# Altium PCB FOC_Drive.PcbDoc
Units mil, origin at the board's own origin, x right, y up, seen from the top; angles counter-clockwise.
Board outline 3150 x 2360 mil, 2 copper layers (Top Layer, Bottom Layer); 50 components, 67 nets, 333 pads, 81 vias.
Unrouted connection lines stored in the file: 1.
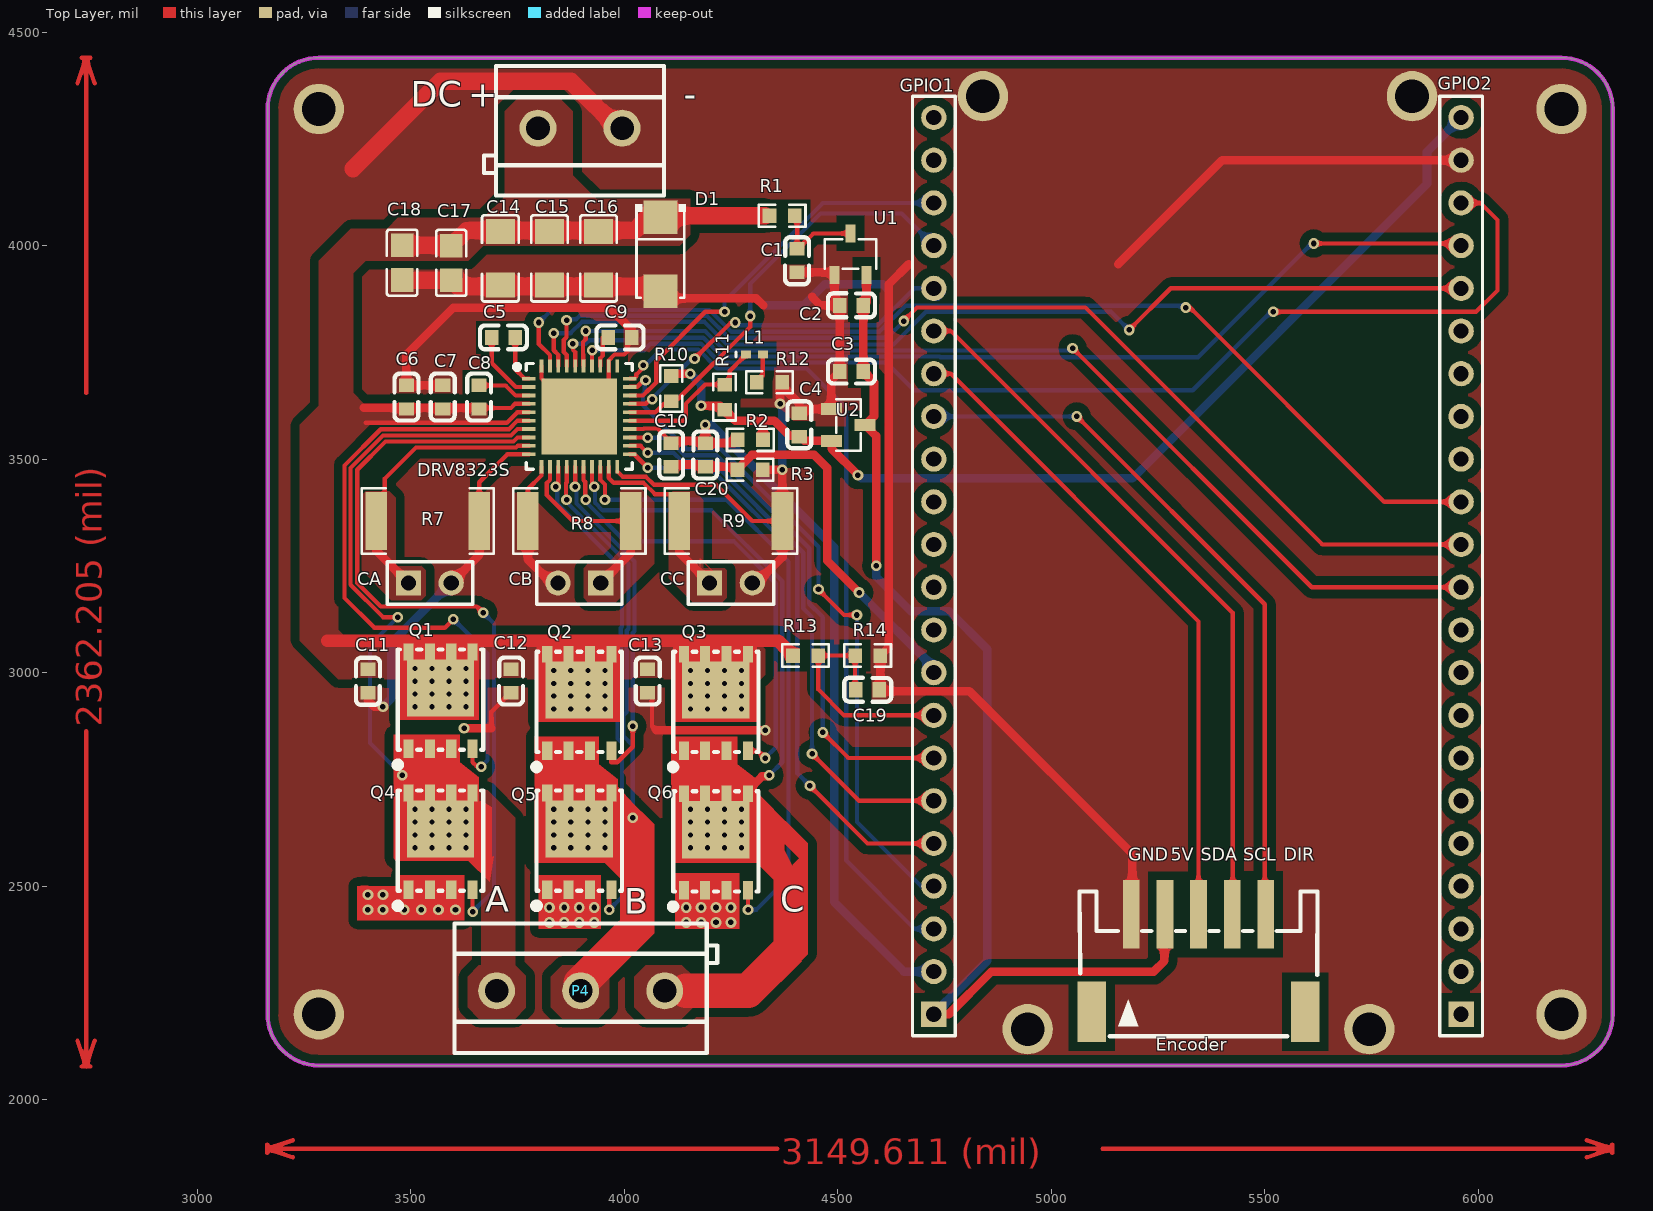
[diagram p0: Top Layer view]
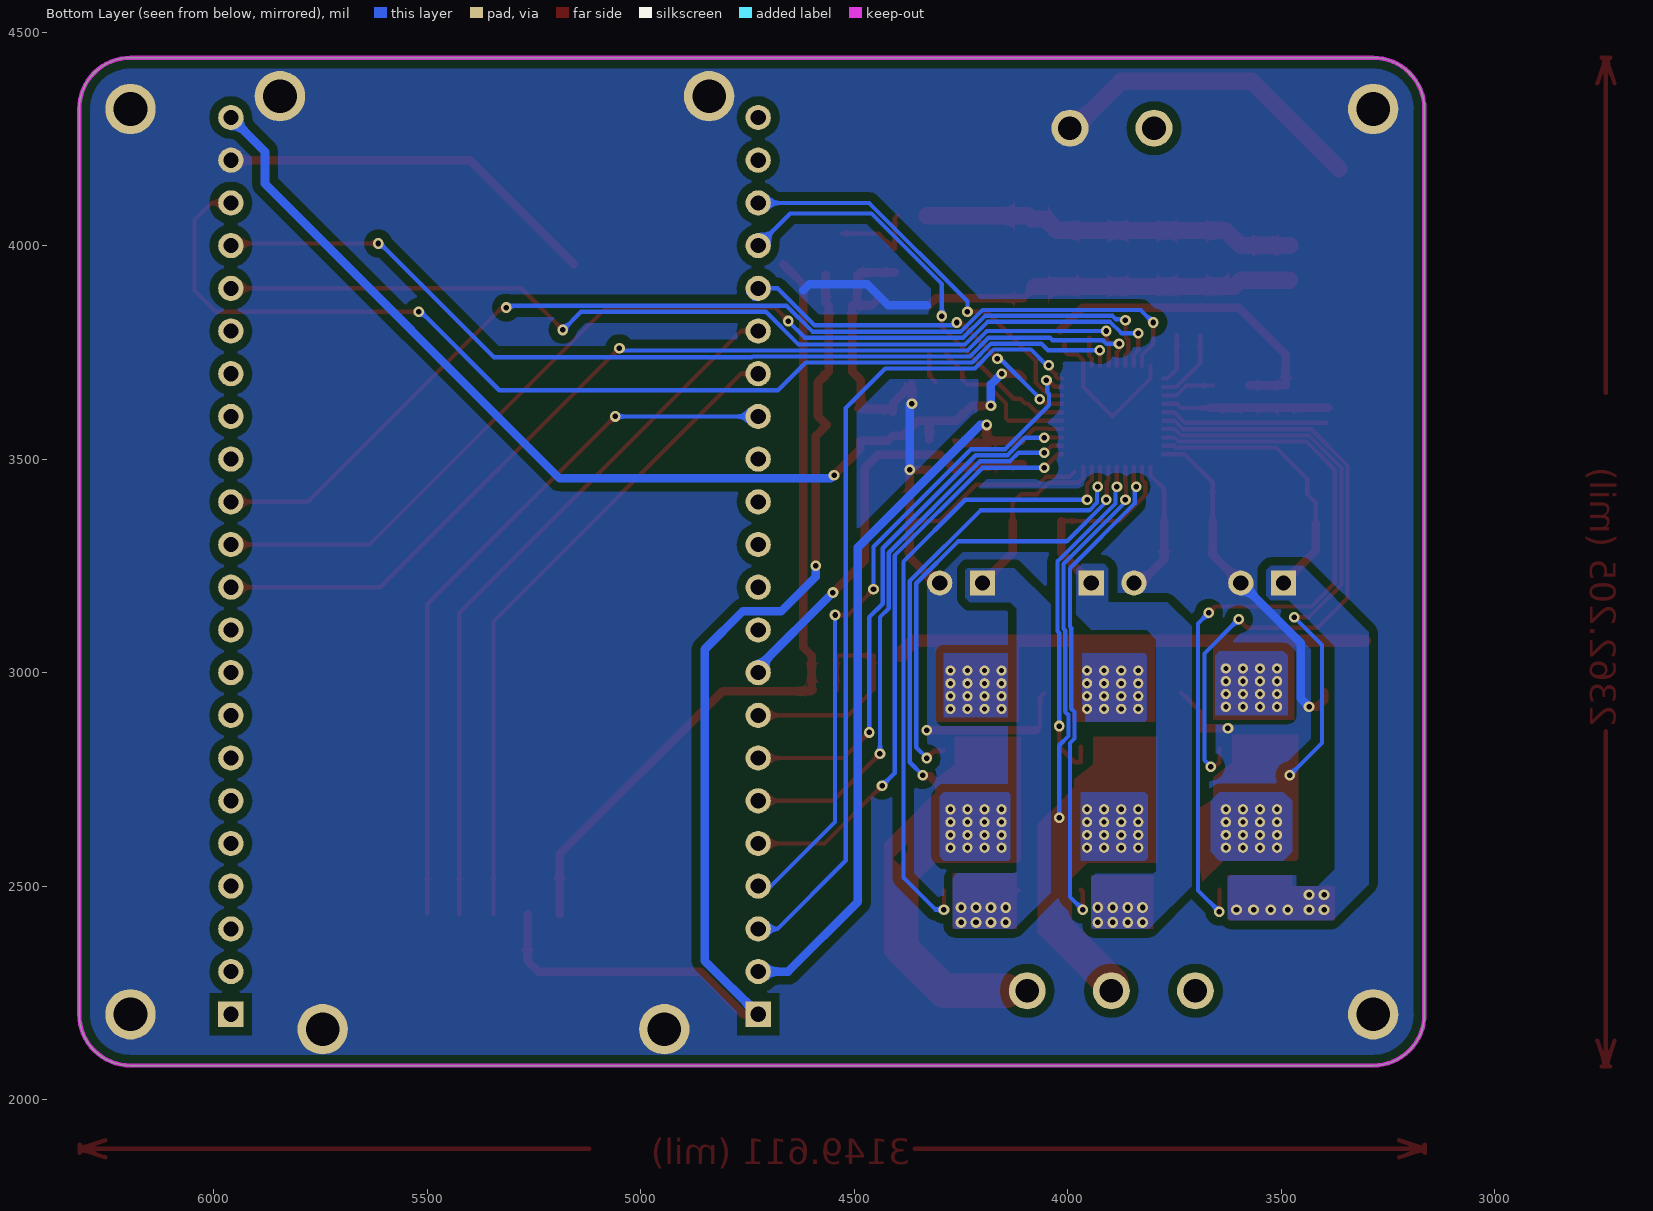
[diagram p1: Bottom Layer view, seen from below]

## Layer stack, top to bottom
Top Solder: solder mask 0.4, Solder Resist, Dk 3.5
Top Layer: signal copper 1.4
Dielectric 1: dielectric 12.6, FR-4, Dk 4.8
Bottom Layer: signal copper 1.4
Bottom Solder: solder mask 0.4, Solder Resist, Dk 3.5

## Board outline
3165,2200 ccw(c3285,2200) 3285,2080 6195,2080 ccw(c6195,2200) 6315,2200 6315,4320 ccw(c6195,4320) 6195,4440 3285,4440 ccw(c3285,4320) 3165,4320

## Design rules (kind name [scope] priority, off if disabled: settings)
Clearance [All] p1: gap=20 ignorepadtopadclearanceinfootprint=FALSE
PolygonConnect [All] p1: connectstyle=Direct reliefconductorwidth=10 reliefentries=4 polygonreliefangle="90 Angle" airgapwidth=10
RoutingVias [All] p1: holewidth=13 width=25 viastyle="Through Hole" minholewidth=13 minwidth=25 maxholewidth=28 maxwidth=50
SolderMaskExpansion [All] p1: expansion=4
Width [All] p1: maxlimit=40 minlimit=10 preferedwidth=10 minimp=50.000000 maximp=50.000000 favimp=50.000000
30 further rules are at their usual default settings.

## Classes and differential pairs
component class FOC_Drive_2: C20 R2 R3

## Components (designator, comment, footprint, x,y, rotation, side; value= is the part's Value field where it differs from the comment)
C1 "Cap" C0603 4405,3965 r90 top value=10uF
C2 "Cap" C0603 4532.44,3860 r0 top value=10uF
C3 "Cap" C0603 4532.44,3705 r0 top value=1uF
C4 "Cap" C0603 4410,3580 r270 top value=1uF
C5 "Cap" C0603 3717.45,3785 r0 top value=47nF
C6 "Cap" C0603 3490,3645 r270 top value=20uF
C7 "Cap" C0603 3575,3645 r270 top value=0.1uF
C8 "Cap" C0603 3660,3645 r270 top value=1uF
C9 "Cap" C0603 3990,3785 r180 top value=1uF
C10 "Cap" C0603 4110,3510 r90 top value=0.1uF
C11 "Cap" C0603 3400,2980 r90 top value=2.2uF
C12 "Cap" C0603 3735,2980 r270 top value=2.2uF
C13 "Cap" C0603 4055,2980 r270 top value=2.2uF
C14 "Cap" C1206 3710,3970 r90 top value=100uF
C15 "Cap" C1206 3825,3970 r90 top value=100uF
C16 "Cap" C1206 3940,3970 r90 top value=100uF
C17 "Cap" C0805 3595,3959.45 r90 top value=0.1uF
C18 "Cap" C0805 3480,3960 r90 top value=0.1uF
C19 "Cap" C0603 4570,2960 r180 top value=2.2uF
C20 "Cap" C0603 4190,3510 r90 top value=1uF
CA "Current_A" HDR1X2 3495,3210 r0 top (schematic designator P6)
CB "Current_B" HDR1X2 3945,3210 r180 top (schematic designator P7)
CC "Current_C" HDR1X2 4200,3210 r0 top (schematic designator P8)
D1 "SMAJ26A_C840755" SMAJ26A-SMA_L4.3-W2.6-LS5.1-RD 4085,3980 r270 top
DC "DC" CONN-TH_P5.00_KF301-5.0-2P 3896.57,4275 r180 top (schematic designator P5)
DRV8323S "DRV8323SRTAR 40PIN" "DRV8323SRTAR WQFN-40_L6.0-W6.0-P0.50-TL-EP4.5" 3895,3600 r0 top (schematic designator U3)
Encoder "Encoder" CONN-SMD_5P-P2.00_HX20007-5AWB 5345,2320 r0 top (schematic designator P3)
GPIO1 "GPIO1" HDR1X22 4725,2200 r90 top (schematic designator P1)
GPIO2 "GPIO2" HDR1X22 5960,2200 r90 top (schematic designator P2)
L1 "RED" 0402-A 4305,3745 r0 top (schematic designator LED1)
P4 "Motor" CONN-TH_3P-P5.00_KF301-5.0-3P 3898.15,2255 r0 top
Q1 "WSD75100DN56-DFN5X6-8" WSD75100DN56_DFN-8_L5.8-W4.9-P1.27-LS6.1-BL 3570,2935 r0 top
Q2 "WSD75100DN56-DFN5X6-8" WSD75100DN56_DFN-8_L5.8-W4.9-P1.27-LS6.1-BL 3894.84,2930 r0 top
Q3 "WSD75100DN56-DFN5X6-8" WSD75100DN56_DFN-8_L5.8-W4.9-P1.27-LS6.1-BL 4214.69,2930 r0 top
Q4 "WSD75100DN56-DFN5X6-8" WSD75100DN56_DFN-8_L5.8-W4.9-P1.27-LS6.1-BL 3570,2605 r0 top
Q5 "WSD75100DN56-DFN5X6-8" WSD75100DN56_DFN-8_L5.8-W4.9-P1.27-LS6.1-BL 3894.84,2605 r0 top
Q6 "WSD75100DN56-DFN5X6-8" WSD75100DN56_DFN-8_L5.8-W4.9-P1.27-LS6.1-BL 4214.69,2603.19 r0 top
R1 "0R" R0603 4370,4070 r0 top
R2 "0R" R0603 4295.35,3545 r180 top
R3 "0R" R0603 4295,3475 r180 top
R7 "0.005Ohm" R2512 3540,3355 r180 top
R8 "0.005Ohm" R2512 3895,3355 r0 top
R9 "0.005Ohm" R2512 4250,3355 r180 top
R10 "10K" R0603 4110,3665 r90 top
R11 "10K" R0603 4235,3645 r90 top
R12 "1K" R0603 4340,3680 r180 top
R13 "10K" R0603 4425,3040 r180 top
R14 "2K" R0603 4570.35,3040 r180 top
U1 "PW8600A_5V" SOT23-3_L2.9-W1.6-P1.90-LS2.8-BR 4530,3980 r270 top
U2 "PW6566B_3.3" SOT-23-3L_L2.9-W1.3-P1.90-LS2.4-BR 4525,3580 r180 top

## Footprints (in the part's own frame and the unit in brackets; to place one, negate y for a bottom-side part, rotate by r counter-clockwise, add the part's x,y. Pads: shape width x height; smd on the part's side, far side on the other; paste and mask are expansions set on the pad)
0402-A [mm] "Chip Inductor, Body 1.0x0.5mm, IPC High Density"
  rect 0.6x0.5 smd: 1(-0.5,0) 2(0.5,0)
  silkscreen extent -1.1,-0.15 -1.1,0.15, body extent -0.55,-0.3 0.55,0.3, height 0.55
C0603 [mm]
  rect 0.8x0.9 smd: 1(-0.7,0) 2(0.7,0)
  silkscreen extent -1.41,-0.71 1.39,0.72
C0805 [mm]
  rect 1.41x1.35 smd: 1(-1.03,0) 2(1.03,0)
  silkscreen extent -1.96,-0.9 1.96,0.9
C1206 [mm]
  rect 1.485x1.728 smd: 1(-1.593,0) 2(1.593,0)
  silkscreen extent -2.56,-1.09 2.56,1.09
CONN-SMD_5P-P2.00_HX20007-5AWB [mm]
  rect 1x4.1 smd: 1(-4,2.9) 2(-2,2.9) 3(0,2.9) 4(2,2.9) 5(4,2.9)
  rect 1.7x3.6 smd: 6(6.35,-2.9) 7(-6.35,-2.9)
  silkscreen extent -7.08,-4.35 7.07,4.25
CONN-TH_3P-P5.00_KF301-5.0-3P [mm]
  round 2.2 hole 1.4: 1(-5,0) 2(0,0) 3(5,0)
  silkscreen extent -7.5,-3.7 8.13,4
CONN-TH_P5.00_KF301-5.0-2P [mm]
  round 2.2 hole 1.4: 1(-2.5,0) 2(2.5,0)
  silkscreen extent -5,-3.7 5.71,4
"DRV8323SRTAR WQFN-40_L6.0-W6.0-P0.50-TL-EP4.5" [mm]
  rect 0.8x0.22 smd: 1(-3,2.25) 2(-3,1.75) 3(-3,1.25) 4(-3,0.75) 5(-3,0.25) 6(-3,-0.25) 7(-3,-0.75) 8(-3,-1.25) 9(-3,-1.75) 10(-3,-2.25) 21(3,-2.25) 22(3,-1.75) 23(3,-1.25) 24(3,-0.75) 25(3,-0.25) 26(3,0.25) 27(3,0.75) 28(3,1.25) 29(3,1.75) 30(3,2.25)
  rect 0.22x0.8 smd: 11(-2.25,-3) 12(-1.75,-3) 13(-1.25,-3) 14(-0.75,-3) 15(-0.25,-3) 16(0.25,-3) 17(0.75,-3) 18(1.25,-3) 19(1.75,-3) 20(2.25,-3) 31(2.25,3) 32(1.75,3) 33(1.25,3) 34(0.75,3) 35(0.25,3) 36(-0.25,3) 37(-0.75,3) 38(-1.25,3) 39(-1.75,3) 40(-2.25,3)
  rect 4.5x4.5 smd: 41(0,0)
  silkscreen extent -3.85,-3.15 3.15,3.15
HDR1X2 [mm] "Connector; Header; 2 Position"
  rect 1.5x1.5 hole 0.9: 1(0,0)
  round 1.5 hole 0.9: 2(2.54,0)
  silkscreen extent -1.27,-1.27 3.81,1.27
HDR1X22 [mm] "Connector; Header; 22 Position"
  rect 1.5x1.5 hole 0.9: 1(0,0)
  round 1.5 hole 0.9: 2(2.54,0) 3(5.08,0) 4(7.62,0) 5(10.16,0) 6(12.7,0) 7(15.24,0) 8(17.78,0) 9(20.32,0) 10(22.86,0) 11(25.4,0) 12(27.94,0) 13(30.48,0) 14(33.02,0) 15(35.56,0) 16(38.1,0) 17(40.64,0) 18(43.18,0) 19(45.72,0) 20(48.26,0) 21(50.8,0) 22(53.34,0)
  silkscreen extent -1.27,-1.27 54.61,1.27
R0603 [mil]
  rect 31.75x34.02 smd: 1(-29.65,0) 2(29.65,0)
  silkscreen extent -55,-26 55,26
R2512 [mil]
  rect 50.49x136.06 smd: 1(-120.72,0) 2(120.72,0)
  silkscreen extent -155,-77 155,77
SMAJ26A-SMA_L4.3-W2.6-LS5.1-RD [mm]
  rect 2x2 smd: 1(-2.2,0) 2(2.2,0)
  silkscreen extent -2.98,-1.5 2.6,1.5
SOT23-3_L2.9-W1.6-P1.90-LS2.8-BR [mm]
  rect 1.07x0.6 smd: 1(1.235,-0.95) 2(1.235,0.95) 3(-1.235,0)
  silkscreen extent -0.88,-1.54 0.88,1.54
SOT-23-3L_L2.9-W1.3-P1.90-LS2.4-BR [mm]
  rect 1.25x0.7 smd: 1(1,-0.95) 2(1,0.95) 3(-1,0)
  silkscreen extent -0.73,-1.53 0.73,1.53
WSD75100DN56_DFN-8_L5.8-W4.9-P1.27-LS6.1-BL [mm]
  rect 0.6x1.1 smd: 1(-1.905,-2.875) 2(-0.635,-2.875) 3(0.635,-2.875) 4(1.905,-2.875)
  rect 0.6x1 smd: 5(1.905,2.875) 6(0.635,2.875) 7(-0.635,2.875) 8(-1.905,2.875)
  rect 4x3.4 smd: 9(0,0.738)
  silkscreen extent -2.67,-3.96 2.54,3.03

## Part data
C1 C2 C3 C4 C5 C6 C7 C8 C9 C10 C11 C12 C13 C14 C15 C16 C17 C18 C19 C20: "Capacitor 50V", LatestRevisionDate=17-Jul-2002, LatestRevisionNote="Re-released for DXP Platform.", PackageDescription="Radial Cap, Thru-Hole; 2 Leads; 0.3 in Pin Spacing", PackageReference=RAD-0.3, Published=8-Jun-2000, Publisher="Altium Limited"
CA CB CC DC: library part "Header 2", "Header, 2-Pin", LatestRevisionDate=17-Jul-2002, LatestRevisionNote="Re-released for DXP Platform.", Publisher="Altium Limited"
D1: BOM_JLCPCB Part Class="Extended Part", BOM_Manufacturer="MDD（Microdiode Electronics?", BOM_Manufacturer Part=SMAJ26A, BOM_Supplier=LCSC, BOM_Supplier Part=C840755, Contributor=LCSC, spicePre=D, spiceSymbolName=SMAJ26A_C840755
Encoder: library part "Header 5", "Header, 5-Pin", LatestRevisionDate=17-Jul-2002, LatestRevisionNote="Re-released for DXP Platform.", Publisher="Altium Limited"
GPIO1 GPIO2: library part "Header 22", "Header, 22-Pin", LatestRevisionDate=17-Jul-2002, LatestRevisionNote="Re-released for DXP Platform.", Publisher="Altium Limited"
L1: library part LED2, "Typical RED, GREEN, YELLOW, AMBER GaAs LED", LatestRevisionDate=17-Jul-2002, LatestRevisionNote="Re-released for DXP Platform.", PackageDescription="SM LED; 2 Flat Leads", PackageReference=3.2X1.6X1.1, PackageVersion=Feb-2002, Published=8-Jun-2000, Publisher="Altium Limited"
P4: library part "Header 3", "Header, 3-Pin", LatestRevisionDate=17-Jul-2002, LatestRevisionNote="Re-released for DXP Platform.", Publisher="Altium Limited"
R1 R2 R3 R7 R8 R9 R10 R11 R12 R13 R14: library part Res2, "Resistor", LatestRevisionDate=17-Jul-2002, LatestRevisionNote="Re-released for DXP Platform.", PackageDescription="Axial Device, Thru-Hole; 2 Leads; 0.4 in Pin Spacing", PackageReference=AXIAL-0.4, Published=8-Jun-2000, Publisher="Altium Limited"
U1 U2: library part "AMS1117_3.3 SOT-89"

## Free pads (board coordinates)
  round 24 hole 12: 10(3510,2590) 10(3510,2620) 10(3510,2650) 10(3510,2680) 10(3510,2920) 10(3510,2950) 10(3510,2980) 10(3510,3010) 10(3550,2590) 10(3550,2620) 10(3550,2650) 10(3550,2680) 10(3550,2920) 10(3550,2950) 10(3550,2980) 10(3550,3010) 10(3590,2590) 10(3590,2620) 10(3590,2650) 10(3590,2680) 10(3590,2920) 10(3590,2950) 10(3590,2980) 10(3590,3010) 10(3630,2590) 10(3630,2620) 10(3630,2650) 10(3630,2680) 10(3630,2920) 10(3630,2950) 10(3630,2980) 10(3630,3010) 10(3835,2590) 10(3835,2620) 10(3835,2650) 10(3835,2680) 10(3835,2915) 10(3835,2945) 10(3835,2975) 10(3835,3005) 10(3875,2590) 10(3875,2620) 10(3875,2650) 10(3875,2680) 10(3875,2915) 10(3875,2945) 10(3875,2975) 10(3875,3005) 10(3915,2590) 10(3915,2620) 10(3915,2650) 10(3915,2680) 10(3915,2915) 10(3915,2945) 10(3915,2975) 10(3915,3005) 10(3955,2590) 10(3955,2620) 10(3955,2650) 10(3955,2680) 10(3955,2915) 10(3955,2945) 10(3955,2975) 10(3955,3005) 10(4155,2590) 10(4155,2620) 10(4155,2650) 10(4155,2680) 10(4155,2915) 10(4155,2945) 10(4155,2975) 10(4155,3005) 10(4195,2590) 10(4195,2620) 10(4195,2650) 10(4195,2680) 10(4195,2915) 10(4195,2945) 10(4195,2975) 10(4195,3005) 10(4235,2590) 10(4235,2620) 10(4235,2650) 10(4235,2680) 10(4235,2915) 10(4235,2945) 10(4235,2975) 10(4235,3005) 10(4275,2590) 10(4275,2620) 10(4275,2650) 10(4275,2680) 10(4275,2915) 10(4275,2945) 10(4275,2975) 10(4275,3005)
  round 118.11 hole 78.74: 11(6195,2200) 12(6195,4320) 13(3285,4320) 14(3285,2200) 15(4840,4350) 15(5845,4350) 16(4945,2165) 16(5745,2165)

## Via types
v1: diameter 25, hole 13, Top Layer to Bottom Layer, 81 vias

## Nets (pads, with @x,y where several pads share a name; then routed paths per layer and width w, separated by ;. In a path a pad name is that pad's centre, name@x,y a point inside that pad or via, vN(x,y) a via of type N, cw(c..) or ccw(c..) an arc to the next point about the centre after c; other vN are vias at no path point)
3.3V: C4.2 GPIO2.22 R2.1 R10.2 R11.1 U2.2 | length 2442
  Top Layer w10: 4320,3590 4325,3585
  Top Layer w20: R10.2@4105,3689.66 R10.2 4115.35,3700 v1(4155,3700) ; v1(4180,3625) 4224.65,3625 4234.65,3615 R11.1 4260.35,3590 4320,3590 4351.86,3590 4386.97,3554.89 4410,3554.89 4422.29,3542.6 U2.2 4485.63,3524.37 v1(4547.37,3462.63) ; R2.1 4325,3585
  Bottom Layer w10: v1(4547.37,3462.63) v1@4555,3455
  Bottom Layer w20: v1(4155,3700) 4180,3675 v1(4180,3625) ; v1@4555,3455 5190,3455 5880,4145 5880,4220 GPIO2.22
+5: C2.2 C3.2 Encoder.2 GPIO1.1 U1.2 U2.3 | length 2677.1
  Top Layer w10: C2.2 C2.2@4567.4,3867.4
  Top Layer w20: C2.2 C3.2 4585,3680 4585,3600.63 U2.3 4590,3554.37 v1(4590,3250) ; C2.2@4567.4,3867.4 U1.2 ; GPIO1.1 4760,2200 4860,2300 5240,2300 5265,2325 Encoder.2@5265,2434.17
  Bottom Layer w20: v1(4590,3250) 4590,3225 4671.47,3143.53 4761.47,3143.53 4850,3055 4850,2325 GPIO1.1
+24V: C6.2 C7.2 C8.2 C11.2 C12.1 C13.1 C14.2 C15.2 C16.2 C17.2 C18.2 D1.1 DC.2 DRV8323S.4 DRV8323S.5 pad.10@3510,2920 pad.10@3510,2950 pad.10@3510,2980 pad.10@3510,3010 pad.10@3550,2920 pad.10@3550,2950 pad.10@3550,2980 pad.10@3550,3010 pad.10@3590,2920 pad.10@3590,2950 pad.10@3590,2980 pad.10@3590,3010 pad.10@3630,2920 pad.10@3630,2950 pad.10@3630,2980 pad.10@3630,3010 pad.10@3835,2915 pad.10@3835,2945 pad.10@3835,2975 pad.10@3835,3005 pad.10@3875,2915 pad.10@3875,2945 pad.10@3875,2975 pad.10@3875,3005 pad.10@3915,2915 pad.10@3915,2945 pad.10@3915,2975 pad.10@3915,3005 pad.10@3955,2915 pad.10@3955,2945 pad.10@3955,2975 pad.10@3955,3005 pad.10@4155,2915 pad.10@4155,2945 pad.10@4155,2975 pad.10@4155,3005 pad.10@4195,2915 pad.10@4195,2945 pad.10@4195,2975 pad.10@4195,3005 pad.10@4235,2915 pad.10@4235,2945 pad.10@4235,2975 pad.10@4235,3005 pad.10@4275,2915 pad.10@4275,2945 pad.10@4275,2975 pad.10@4275,3005 Q1.5 Q1.6 Q1.7 Q1.8 Q1.9 Q2.5 Q2.6 Q2.7 Q2.8 Q2.9 Q3.5 Q3.6 Q3.7 Q3.8 Q3.9 R1.1 R13.2 | length 2771.8
  Top Layer w10: 3395,3585 3725,3585 3749.84,3609.84 DRV8323S.5 ; C17.2@3594.45,4000.55 C17.2 ; C8.2@3667.55,3620 3735,3620 3744.53,3629.53 DRV8323S.4 ; DC.2@3794.72,4261.57 DC.2@3798.15,4265
  Top Layer w20: 3390,3620 C8.2@3667.55,3620 ; D1.1@4085,4061.87 D1.1@4093.13,4070
  Top Layer w30: 3305,3074.66 3819.84,3074.66 3869.84,3074.66 4360.69,3074.66 R13.2
  Top Layer w40: C18.2 C17.2@3594.45,4000.55 ; C17.2 3630.7,4035.7 4025.7,4035.7 4051.87,4061.87 D1.1@4085,4061.87 ; D1.1@4093.13,4070 R1.1@4330,4070
A3.3V: C10.2 C20.2 DRV8323S.24 GPIO1.2 R2.2 | length 1869.8
  Top Layer w10: DRV8323S.24 4045.06,3570.47 4046.09,3571.5 4078.5,3571.5 C10.2@4107.44,3542.55 ; C20.2@4180,3542.55 C20.2@4185,3537.55 ; R2.2@4258.24,3537.55 R2.2
  Top Layer w20: C10.2@4107.44,3542.55 C20.2@4180,3542.55 ; C20.2@4185,3537.55 C20.2 ; v1(4190,3580) C20.2 ; R2.2@4258.24,3537.55 C20.2
  Bottom Layer w20: v1(4190,3580) 4205,3580 4491.5,3293.5 4491.5,2463.5 4655,2300 4711,2300 GPIO1.2@4725,2314
AGND: C10.1 C20.1 GPIO1.9 R3.2 | length 986.3
  Top Layer w10: C20.1@4180,3487.45 C20.1@4185,3482.45 ; R3.2@4257.9,3482.45 R3.2 R3.2@4265.35,3476.13
  Top Layer w20: C10.1@4105,3487.45 C20.1@4180,3487.45 ; C20.1@4185,3482.45 C20.1 R3.2@4257.9,3482.45 ; R3.2@4265.35,3476.13 4299.21,3510 4445,3510 4475,3480 4475,3262.5 v1(4550,3187.5)
  Bottom Layer w20: v1(4550,3187.5) 4725,3012.5 GPIO1.9
CS: GPIO1.11
DC: GPIO1.12
DIR: Encoder.5 GPIO1.15 | length 1680.6
  Top Layer w10: v1(5060,3600) 5500,3160 Encoder.5@5500,2436.65
  Bottom Layer w10: GPIO1.15 v1(5060,3600)
DRV_nSCS: DRV8323S.29 GPIO1.4 | length 1595.2
  Top Layer w10: DRV8323S.29 4013.78,3669.57 4030.51,3669.57 4045.94,3685 v1(4050,3685) ; v1(4455,3195) 4515,3135 v1(4545,3135)
  Bottom Layer w10: v1(4050,3685) 4048.47,3683.47 4048.47,3657.5 4043.97,3653 4043.97,3626.03 4146.73,3523.27 4226.73,3523.27 4455,3295 v1(4455,3195) ; v1(4545,3135) 4545,2650 4695,2500 GPIO1.4
ENABLE: DRV8323S.30 GPIO1.3 | length 1928.5
  Top Layer w10: DRV8323S.30 4023.19,3688.58 4028.5,3693.89 4028.5,3698.5 4045,3715 v1(4045,3720)
  Bottom Layer w10: v1(4045,3720) 4050,3720 4086.5,3756.5 4173.7,3756.5 4217.81,3712.39 4427.61,3712.39 4520,3620 4520,2560 4680,2400 GPIO1.3
GH_A: DRV8323S.6 Q1.4 | length 1518
  Top Layer w10: v1(3600,3125) 3580,3105 3415,3105 3345,3175 3345,3485 3430,3570 3730,3570 3750.16,3590.16 DRV8323S.6 ; Q1.4 3645,2790 3655,2780 v1(3665,2780)
  Bottom Layer w10: v1(3600,3125) 3680,3045 3680,2795 v1(3665,2780)
GH_B: DRV8323S.15 Q2.4 | length 816.4
  Top Layer w10: v1(3885,3435) 3885.16,3435.16 DRV8323S.15 ; Q2.4@3969.84,2826.66 Q2.4 3969.84,2790.16 3983.72,2790.16 4020,2826.44 v1(4020,2875)
  Bottom Layer w10: v1(3885,3435) 3888.5,3431.5 3888.5,3396.09 4024,3260.59 4024,3097.09 4020,3093.09 v1(4020,2875)
GH_C: DRV8323S.16 Q3.4 | length 1075.2
  Top Layer w10: DRV8323S.16 3904.84,3450.57 3908.5,3446.91 3908.5,3406.5 v1(3910,3405) ; Q3.4 4313.19,2816.81 v1(4330,2800)
  Bottom Layer w10: v1(3910,3405) 3912.87,3402.13 3912.87,3396.93 4002.34,3307.46 4257.03,3307.46 4355,3209.49 4355,2825 v1(4330,2800)
GL_A: DRV8323S.8 Q4.4 | length 1805.6
  Top Layer w10: v1(3645,2440) Q4.4 ; v1(3670,3140) 3655,3155 3429.8,3155 3374.8,3210 3374.8,3475 3441.03,3541.23 3740.83,3541.23 3750.39,3550.79 DRV8323S.8
  Bottom Layer w10: v1(3645,2440) 3695,2490 3695,3115 v1(3670,3140)
GL_B: DRV8323S.13 Q5.4 | length 1173.4
  Top Layer w10: v1(3840,3435) 3845.79,3440.79 DRV8323S.13 ; v1(3965,2445) 3965,2486.97 Q5.4
  Bottom Layer w10: v1(3840,3435) 3843.5,3431.5 3843.5,3395.99 3995,3244.49 3995,3107.69 3992,3104.69 3992,2915.48 3984.5,2907.98 3984.5,2845.7 3995,2835.2 3995,2475 v1(3965,2445)
GL_C: DRV8323S.18 Q6.4 | length 1482.6
  Top Layer w10: DRV8323S.18 3944.21,3451.2 3955,3440.41 v1(3955,3405) ; Q6.4 4289.84,2489.84 4289.84,2445.16 v1(4290,2445)
  Bottom Layer w10: v1(3955,3405) 4240,3405 4385,3260 4385,2520 4310,2445 v1(4290,2445)
GND: C1.1 C2.1 C3.1 C4.1 C6.1 C7.1 C9.1 C11.1 C12.2 C13.2 C14.1 C15.1 C16.1 C17.1 C18.1 C19.1 CA.2 CB.2 CC.2 D1.2 DC.1 DRV8323S.10 DRV8323S.11 DRV8323S.20 DRV8323S.32 DRV8323S.40 DRV8323S.41 Encoder.1 GPIO2.21 pad.11 pad.12 pad.13 pad.14 pad.15 pad.16 R3.1 R7.1 R8.1 R9.1 R12.1 R14.1 U1.1 U2.1 | length 9236.2
  Top Layer w10: C18.1 C18.1@3480.55,3918.9 ; R7.1 3660.72,3445.72 3726.42,3511.42 DRV8323S.10 ; 3688.94,2870 3688.94,2908.35 3733.03,2952.45 C12.2 ; R8.1 3774.28,3429.28 3806.42,3461.42 DRV8323S.11 ; DRV8323S.40 3806.42,3688.58 DRV8323S.41 3963.9,3668.9 DRV8323S.32 3963.9,3731.24 3977.6,3744.93 4000.21,3744.93 4007.55,3752.28 C9.1@4007.55,3777.28 ; CB.2@3820.61,3219.39 CB.2@3835.61,3219.39 ; DRV8323S.20@3984.25,3471.14 3996.89,3458.5 4051.09,3458.5 4069.59,3440 4215,3440 4300,3355 R9.1 ; C13.2 4065,2942.45 4065,2875 4075,2865 ; D1.2@4076.96,3904.3 D1.2@4104.76,3876.5 ; CC.2 4309.39,3219.39 CC.2@4319.39,3219.39 ; 4325.94,3860 4330,3860 ; R12.1@4365,3675.34 R12.1 ; U2.1@4485,3628.51 4496.11,3617.4 U2.1 ; U1.1@4486.54,3937.45 U1.1 ; C2.1@4492.6,3874.26 4504.89,3861.97 C2.1
  Top Layer w20: C11.1@3400,2953.67 C11.1 3400,2935 3415,2920 v1(3435,2920) ; C7.1 C6.1 3490,3745 3600,3855 3965,3855 C9.1@4017.55,3802.45 ; CA.2 3660.72,3275.72 R7.1 ; v1(3625,2870) 3688.94,2870 ; R8.1 3774.28,3265.72 CB.2@3820.61,3219.39 ; CB.2@3835.61,3219.39 CB.2 ; 4075,2865 v1(4330,2865) ; D1.2@4104.76,3876.5 4309.44,3876.5 4325.94,3860 ; CC.2@4319.39,3219.39 4370.72,3270.72 R9.1 ; R3.1 v1(4370,3475) 4370.36,3474.64 R9.1@4370.36,3356.08 ; v1(4365,3630) R12.1@4365,3675.34 ; R12.1@4370,3670 4410,3630 4410,3610 4417.4,3617.4 U2.1 ; C1.1 U1.1@4486.54,3937.45 ; 4440,3880 4460,3860 C2.1 C3.1 4485,3685.11 U2.1@4485,3628.51 ; C2.1@4492.6,3874.26 U1.1 ; C19.1 C19.1@4600,2957.55 ; 4666.47,3956.47 4620,3910 4620,3060 R14.1 C19.1@4600,2957.55 ; 5156.47,3956.47 5400,4200 GPIO2.21 ; Encoder.1@5190,2434.17 5190,2575 4808.53,2956.47 4601.08,2956.47 C19.1@4600,2957.55
  Top Layer w40: 3365,4180 3570,4385 3875,4385 DC.1@3995,4265 ; C18.1@3480.55,3918.9 C17.1 3609.59,3904.3 D1.2@4076.96,3904.3
  Bottom Layer w20: v1(3435,2920) 3455,2940 3455,3070 CA.2 ; 4330,3860 4420,3860 4470,3910 4605,3910 4620,3895 ; v1(4365,3630) 4370,3625 v1(4370,3475)
GPIO_3: GPIO1.14
GPIO_4: GPIO1.13
GPIO_11: GPIO1.10
GPIO_22: GPIO2.1
GPIO_23: GPIO2.2
GPIO_24: GPIO2.3
GPIO_25: GPIO2.4
GPIO_26: GPIO2.5
GPIO_27: GPIO2.6
GPIO_28: GPIO2.7
GPIO_29: GPIO2.8
GPIO_30: GPIO2.9
GPIO_33: GPIO2.10
GPIO_37: GPIO2.14
GPIO_38: GPIO2.15
GPIO_39: GPIO2.16
GPIO_40: GPIO2.17
GPIO_52: GPIO1.22
GPIO_54: GPIO1.21
I2C1_SCL: Encoder.4 GPIO1.17 | length 1679.2
  Top Layer w10: GPIO1.17 4765,3800 5425,3140 Encoder.4@5425,2434.17
I2C1_SDA: Encoder.3 GPIO1.16 | length 1546.1
  Top Layer w10: GPIO1.16 4765,3700 5345,3120 Encoder.3
Motor_A: DRV8323S.7 P4.1 pad.10@3510,2590 pad.10@3510,2620 pad.10@3510,2650 pad.10@3510,2680 pad.10@3550,2590 pad.10@3550,2620 pad.10@3550,2650 pad.10@3550,2680 pad.10@3590,2590 pad.10@3590,2620 pad.10@3590,2650 pad.10@3590,2680 pad.10@3630,2590 pad.10@3630,2620 pad.10@3630,2650 pad.10@3630,2680 Q1.1 Q1.2 Q1.3 Q4.5 Q4.6 Q4.7 Q4.8 Q4.9 | length 1845.4
  Top Layer w10: v1(3470,3130) 3435,3130 3359,3206 3359,3479 3435.23,3555.23 3735.03,3555.23 3750.27,3570.47 DRV8323S.7 ; Q4.8 Q1.1 ; Q4.7 3545,2770 Q1.2 ; Q4.9 3574.36,2634.06 Q4.9@3575.3,2635 ; Q4.6 3595,2770 Q1.3 ; Q4.5@3645,2709.99 3645,2740
  Top Layer w20: 3495,2795 Q1.1 ; 3520,2770 3545,2770 3595,2770 3615,2770 3645,2740
  Top Layer w40: 3495,2795 3520,2770
  Bottom Layer w10: v1(3470,3130) 3405,3065 3405,2835 v1(3480,2760)
Motor_B: DRV8323S.14 P4.2 pad.10@3835,2590 pad.10@3835,2620 pad.10@3835,2650 pad.10@3835,2680 pad.10@3875,2590 pad.10@3875,2620 pad.10@3875,2650 pad.10@3875,2680 pad.10@3915,2590 pad.10@3915,2620 pad.10@3915,2650 pad.10@3915,2680 pad.10@3955,2590 pad.10@3955,2620 pad.10@3955,2650 pad.10@3955,2680 Q2.1 Q2.2 Q2.3 Q5.5 Q5.6 Q5.7 Q5.8 Q5.9 | length 1679.7
  Top Layer w10: Q2.1 3810,2806.97 3814.92,2802.05 3913.25,2703.73 3931.97,2685 3955,2685 4002.29,2685 4010,2677.29 ; v1(3865,3404.9) 3865,3410.33 3863.5,3411.83 3863.5,3443.91 3865.47,3445.88 DRV8323S.14 ; Q5.5 3969.84,2716.8 3976.65,2709.99 Q5.5@3977.3,2709.99
  Top Layer w40: Q5.5@3977.3,2709.99 4002.29,2685 ; 4010,2385 4010,2677.29
  Top Layer w80: P4.2 3898.15,2273.15 4010,2385
  Bottom Layer w10: v1(3865,3404.9) 3865,3399.8 4010,3254.8 4010,3102.89 4006,3098.89 4006,2908.18 4000,2902.18 ; 3998.5,2902.18 3998.5,2851.5 4020,2830 v1(4020,2660)
Motor_C: DRV8323S.17 P4.3 pad.10@4155,2590 pad.10@4155,2620 pad.10@4155,2650 pad.10@4155,2680 pad.10@4195,2590 pad.10@4195,2620 pad.10@4195,2650 pad.10@4195,2680 pad.10@4235,2590 pad.10@4235,2620 pad.10@4235,2650 pad.10@4235,2680 pad.10@4275,2590 pad.10@4275,2620 pad.10@4275,2650 pad.10@4275,2680 Q3.1 Q3.2 Q3.3 Q6.5 Q6.6 Q6.7 Q6.8 Q6.9 | length 1644.4
  Top Layer w10: DRV8323S.17 3924.53,3444.53 3930,3439.06 v1(3930,3435) ; Q6.5@4289.69,2714.99 Q6.5 Q6.5@4289.69,2724.25 ; v1@4337.13,2757.13 v1(4340,2760)
  Top Layer w20: Q3.1 4139.69,2785.32 4155,2770 4265,2770 4289.69,2745.32 4289.69,2724.25 4322.56,2757.13 v1@4337.13,2757.13
  Top Layer w80: 4145,2255 4290,2255 4387.5,2352.5
  Bottom Layer w10: v1(3930,3435) 3931.5,3433.5 3931.5,3398.09 3949.59,3380 4204.29,3380 4370,3214.29 4370,2790 v1(4340,2760)
NetC1_2: C1.2 R1.2 U1.3 | length 219.6
  Top Layer w10: R1.2 4405,4064.66 C1.2 4406.97,3992.55 4443.04,4028.63 U1.3
NetC5_1: C5.1 DRV8323S.2 | length 175.1
  Top Layer w10: C5.1@3690,3790 3690,3770.11 3690,3725 3746.1,3668.9 DRV8323S.2
NetC5_2: C5.2 DRV8323S.1 | length 120.5
  Top Layer w10: C5.2@3745,3790 C5.2 3745,3710.39 3766.81,3688.58 DRV8323S.1
NetC8_1: C8.1 DRV8323S.3 | length 126.6
  Top Layer w10: C8.1 3722.45,3672.55 3745.79,3649.21 DRV8323S.3
NetC9_2: C9.2 DRV8323S.33 | length 69.3
  Top Layer w10: DRV8323S.33 3944.21,3736.86 3950,3742.65 C9.2@3950,3785
NetLED1_1: DRV8323S.25 L1.1 R11.2 | length 369.8
  Top Layer w10: DRV8323S.25 4139.14,3590.16 4145,3596.02 4145,3630 4189.65,3674.66 R11.2 4236.13,3674.66 4247.01,3685.53 4247.01,3706.69 4278.5,3738.19 4278.5,3740.16 4283.35,3745 L1.1
NetLED1_2: L1.2 R12.2 | length 70.9
  Top Layer w10: R12.2 4310.35,3681.13 4324.69,3695.47 L1.2
SN_A: 
SN_B: 
SN_C: 
SO_A: DRV8323S.23 GPIO1.7 | length 1257.2
  Top Layer w10: DRV8323S.23 4054.21,3550.79 v1(4055,3550) ; v1(4465,2860) 4525,2800 GPIO1.7
  Bottom Layer w10: v1(4055,3550) 4100.2,3550 4140.93,3509.27 4215.73,3509.27 4433.5,3291.5 4433.5,3161.5 4465,3130 v1(4465,2860)
SO_B: DRV8323S.22 GPIO1.6 | length 1320
  Top Layer w10: DRV8323S.22 4038.49,3531.1 4054.59,3515 v1(4055,3515) ; v1(4440,2810) 4550,2700 GPIO1.6
  Bottom Layer w10: v1(4055,3515) 4115.4,3515 4135.13,3495.27 4205.13,3495.27 4419.5,3280.9 4419.5,3150.5 4440,3130 v1(4440,2810)
SO_C: DRV8323S.21 GPIO1.5 | length 1388.2
  Top Layer w10: DRV8323S.21 4023.58,3511.42 v1(4055,3480) ; v1(4435,2735) 4570,2600 GPIO1.5
  Bottom Layer w10: v1(4055,3480) 4200,3480 4405.5,3274.5 4405.5,2764.5 v1(4435,2735)
SP_A: CA.1 DRV8323S.9 Q4.1 Q4.2 Q4.3 R7.2 | length 703.6
  Top Layer w10: R7.2@3419.28,3350 R7.2 3419.28,3397.78 3439.53,3418.03 3439.53,3454.53 3512.23,3527.23 3746.63,3527.23 3750.5,3531.1 DRV8323S.9
  Top Layer w20: 3385,2491.81 3398.19,2491.81 v1@3403.19,2486.81 ; R7.2@3419.28,3350 3419.28,3285.72 CA.1 ; Q4.1 3525,2491.81
  other v1: 3400,2445 3435,2445 3485,2445 3525,2445 3565,2445 3605,2445 3400,2480 3435,2480
SP_B: CB.1 DRV8323S.12 Q5.1 Q5.2 Q5.3 R8.2 | length 669.2
  Top Layer w10: 3819.84,2470.16 Q5.1 Q5.2 Q5.3 v1@3919.84,2410 ; DRV8323S.12 3826.1,3451.51 3818.5,3443.91 3818.5,3416.09 3879.59,3355 R8.2
  Top Layer w20: CB.1 4015.72,3280.72 R8.2
  other v1: 3825,2415 3860,2415 3895,2415 3930,2415 3825,2450 3860,2450 3895,2450 3930,2450
SP_C: CC.1 DRV8323S.19 Q6.1 Q6.2 Q6.3 R9.2 | length 474.2
  Top Layer w10: DRV8323S.19 3963.9,3456.1 3975.5,3444.5 4045.3,3444.5 4071.76,3418.03 4109.03,3418.03 4129.28,3397.78 R9.2 ; 4115,2490 Q6.1 ; 4130,2455 4135,2450 v1(4145,2450)
  Top Layer w20: R9.2 4129.28,3280.72 CC.1
  other v1: 4145,2415 4180,2415 4215,2415 4250,2415 4180,2450 4215,2450 4250,2450
SPI1_MISO: DRV8323S.26 GPIO1.19 R10.1 | length 994.4
  Top Layer w10: DRV8323S.26 4073.36,3609.84 4093.87,3630.34 4100,3630.34 4110.88,3641.22 4126.63,3641.22 4295,3809.59 v1(4295,3835)
  Bottom Layer w10: v1(4295,3835) 4295,3910 4460,4075 4650,4075 GPIO1.19
SPI1_MOSI: DRV8323S.27 GPIO1.18 | length 884.4
  Top Layer w10: DRV8323S.27 4050.47,3629.53 4060.94,3640 v1(4065.47,3640) ; v1(4164.8,3735) 4249.8,3820 v1(4260,3820)
  Bottom Layer w10: v1(4065.47,3640) 4065.47,3642.34 4158.13,3735 v1(4164.8,3735) ; v1(4260,3820) 4266.5,3813.5 4593.3,3813.5 4679.8,3900 GPIO1.18 4725,3875.47 4735.16,3875.47 GPIO1.18@4748.65,3888.96
SPI1_SCK: DRV8323S.28 GPIO1.20 | length 942.7
  Top Layer w10: DRV8323S.28 4044.28,3649.21 4058.57,3663.5 4058.91,3663.5 4075,3679.59 4075,3730 4190,3845 v1(4235,3845)
  Bottom Layer w10: v1(4235,3845) 4235,3869.8 4465.2,4100 GPIO1.20
TIM1_CH1: DRV8323S.34 GPIO2.20 | length 2572
  Top Layer w10: DRV8323S.34 3924.76,3718.34 3924.76,3754.76 v1(3925,3755) ; v1(5520,3845) 5995,3845 6045,3895 6045,4060 6005,4100 GPIO2.20
  Bottom Layer w10: v1(3925,3755) 4046.53,3755 4062.03,3770.5 4179.5,3770.5 4223.61,3726.39 4613.61,3726.39 4678.53,3661.47 5331.47,3661.47 5515,3845 v1(5520,3845)
TIM1_CH1N: DRV8323S.35 GPIO2.11 | length 2388.2
  Top Layer w10: DRV8323S.35 3904.17,3718.78 3904.17,3745.42 3903.5,3746.09 3903.5,3774.44 3910,3780.94 v1(3910,3800) ; v1(5050,3760) 5610,3200 GPIO2.11
  Bottom Layer w10: v1(3910,3800) 4189.6,3800 4235.1,3754.5 5044.5,3754.5 v1(5050,3760)
TIM1_CH2: DRV8323S.36 GPIO2.19 | length 2269.5
  Top Layer w10: v1(3880,3770) 3880,3755.94 3885.16,3750.78 DRV8323S.36 ; v1(5615,4005) GPIO2.19@5960,4005
  Bottom Layer w10: v1(3880,3770) 3909.59,3770 3918.09,3778.5 4035.93,3778.5 4041.93,3784.5 4185.3,3784.5 4229.41,3740.39 4739.09,3740.39 4740.99,3738.5 5343.5,3738.5 5610,4005 v1(5615,4005)
TIM1_CH2N: DRV8323S.37 GPIO2.12 | length 2492.7
  Top Layer w10: v1(3865,3825) 3865,3785.41 3858.5,3778.91 3858.5,3751.09 3865.47,3744.12 DRV8323S.37 ; v1(4655,3823.3) 4655,3824.49 4685.51,3855 5080,3855 5635,3300 GPIO2.12
  Bottom Layer w10: v1(3865,3825) 3867.87,3827.87 3887.67,3827.87 3895.3,3835.5 4193.7,3835.5 4244.7,3784.5 4616.2,3784.5 v1(4655,3823.3)
TIM1_CH3: DRV8323S.38 GPIO2.18 | length 2329
  Top Layer w10: v1(3835,3795) 3835,3754.8 3845.79,3744.01 DRV8323S.38 ; v1(5182.5,3802.5) 5280,3900 GPIO2.18
  Bottom Layer w10: v1(3835,3795) 3874.59,3795 3901.09,3821.5 4187.9,3821.5 4240.9,3768.5 4630.6,3768.5 4707.1,3845 5140,3845 v1(5182.5,3802.5)
TIM1_CH3N: DRV8323S.39 GPIO2.13 | length 2521.2
  Top Layer w10: v1(3800,3820) 3800,3769.59 3826.1,3743.49 DRV8323S.39 ; v1(5315,3855) 5325,3855 5780,3400 GPIO2.13
  Bottom Layer w10: v1(3800,3820) 3829.5,3849.5 4199.5,3849.5 4250.5,3798.5 4598.09,3798.5 4658.59,3859 5311,3859 v1(5315,3855)
VBUS_S: C19.2 GPIO1.8 R13.1 R14.2 | length 547.8
  Top Layer w10: C19.2@4544.89,2955 4540.69,2959.2 R14.2 R13.1 4454.65,2960.34 4515,2900 GPIO1.8
pads on no net: DRV8323S.31 Encoder.6 Encoder.7
copper on no net: | length 4544.3
  Top Layer w10: 2720,2137.8 2740,2077.8 ; 2720,4380 2740,4440 ; 2730,2077.8 2750,2077.8 ; 2730,4440 2750,4440 ; 2740,2863.02 2740,2077.8 ; 2740,3654.77 2740,4440 ; 2760,2137.8 2740,2077.8 ; 2760,4380 2740,4440 ; 3164.25,1875 3164.25,1895 ; 3224.25,1865 3164.25,1885 ; 3224.25,1905 3164.25,1885 ; 4358.18,1885 3164.25,1885 ; 5119.94,1885 6313.87,1885 ; 6253.87,1865 6313.87,1885 ; 6253.87,1905 6313.87,1885 ; 6313.87,1875 6313.87,1895

## Polygon pours and split planes (outlines as drawn)
Motor_A on Top Layer "MOTOR_A_L01_P071" (solid, remove dead copper, pour order 71): 3660,2725 3680,2725 3745,2660 3745,2305 3740,2300 3670,2300 3665,2305 3665,2680 3645,2700 3645,2710
GND on Top Layer "GND_L01_P008" (solid, remove dead copper, pour order 8): 3265,4440 ccw(c3265,4340) 3165,4340 3165,2180 ccw(c3265,2180) 3265,2080 6215,2080 ccw(c6215,2180) 6315,2180 6315,4340 ccw(c6215,4340) 6215,4440
+24V on Top Layer "+24V_L01_P075" (solid, remove dead copper, pour order 75): 3330,3506.05 3410,3586.05 3410,3600 3310,3600 3307.5,3602.5 3305,3600 3305,3520 3316.05,3520
Motor_A on Top Layer "MOTOR_A_L01_P028" (solid, remove dead copper, pour order 28): 3660,2315 3745,2315 3770,2290 3770,2215 3745,2190 3660,2190 3633.39,2216.61 3633.39,2288.39
Motor_B on Top Layer "MOTOR_B_L01_P030" (solid, remove dead copper, pour order 30): 3855,2315 3940,2315 3965,2290 3965,2215 3940,2190 3855,2190 3828.39,2216.61 3828.39,2288.39
Motor_C on Top Layer "MOTOR_C_L01_P032" (solid, remove dead copper, pour order 32): 4050,2315 4135,2315 4160,2290 4160,2215 4135,2190 4050,2190 4023.39,2216.61 4023.39,2288.39
SP_C on Top Layer "SP_C_L01_P069" (solid, remove dead copper, pour order 69): 4178.39,3266.61 4206.27,3238.73 4178.39,3238.73
SP_C on Top Layer "SP_C_L01_P067" (solid, remove dead copper, pour order 67): 4240,3175 4230,3165 4160,3165 4104.21,3220.79 4104.21,3415.47 4113.74,3425 4165,3425 4185,3405 4185,3245 4235,3245 4240,3240
SP_B on Top Layer "SP_B_L01_P061" (solid, remove dead copper, pour order 61): 3915,3255 3905,3245 3905,3175 3915,3165 3980,3165 4070,3255 4070,3400 4040,3430 3995,3430 3990,3425 3990,3285 3960,3255
no net on Top Layer "NONET_L01_P055" (solid, remove dead copper, pour order 55): 3385,3270
SP_A on Top Layer "SP_A_L01_P053" (solid, remove dead copper, pour order 53): 3395,3425 3385,3415 3385,3240 3455,3170 3525,3170 3535,3180 3535,3240 3525,3250 3524.58,3249.58 3469.63,3249.58 3465,3254.21 3465,3410 3450,3425
+24V on Top Layer "+24V_L01_P033" (solid, remove dead copper, pour order 33): 3470,3070 4315,3070 4330,3055 4330,2995 4320,2985 3470,2985
no net on Top Layer "NONET_L01_P026" (solid, remove dead copper, pour order 26): 3665,2311.61
+24V on Top Layer "+24V_L01_P024" (solid, remove dead copper, pour order 24): 3285,3625 3240,3580 3240,3075 3330,2985 3530,2985 3545,3000 3545,3070 3360,3070 3330,3100 3330,3580
+24V on Top Layer "+24V_L01_P022" (solid, remove dead copper, pour order 22): 3460,4025 3460,3965 3395,3965 3365,3935 3365,3655 3390,3630 3680,3630 3680,3585 3675,3580 3330,3580 3285,3625 3285,3965 3360,4040 3445,4040
+24V on Top Layer "+24V_L01_P018" (solid, remove dead copper, pour order 18): 3720,4165 3720,4115 3670,4065 3470,4065 3445,4040 3445,3980 3460,3965 3635,3965 3670,4000 4130,4000 4155,4025 4155,4110 3935,4110 3880,4165
no net on Top Layer "NONET_L01_P016" (solid, remove dead copper, pour order 16): 3720,4165
+24V on Top Layer "+24V_L01_P012" (solid, remove dead copper, pour order 12): 3755,4350 3845,4350 3880,4315 3880,4165 3720,4165 3720,4315
SP_A on Bottom Layer "SP_A_L02_P035" (solid, remove dead copper, pour order 35): 3295,2505 3295,3095 3450,3250 3525,3250 3535,3240 3535,3180 3525,3170 3483.14,3170 3445,3131.86 3375,3061.86 3375,2540 3415,2500 3465,2500 3465,2525 3620,2525 3625,2520 3625,2425 3620,2420 3380,2420
GND on Bottom Layer "GND_L02_P010" (solid, remove dead copper, pour order 10): 3165,2180 ccw(c3265,2180) 3265,2080 6215,2080 ccw(c6215,2180) 6315,2180 6315,4340 ccw(c6215,4340) 6215,4440 3265,4440 ccw(c3265,4340) 3165,4340
+24V on Bottom Layer "+24V_L02_P079" (solid, remove dead copper, pour order 79): 3820,3045 3815,3040 3815,2890 3820,2885 3970,2885 3975,2890 3975,3040 3970,3045
SP_B on Bottom Layer "SP_B_L02_P041" (solid, remove dead copper, pour order 41): 3810,2400 3710,2500 3710,3108.14 3766.86,3165 3905,3165 3905,3245 3915,3255 3965,3255 3980,3240 3980,3135 3945,3100 3815,3100 3792.5,3077.5 3792.5,2535 3810,2523.33
Motor_B on Bottom Layer "MOTOR_B_L02_P085" (solid, remove dead copper, pour order 85): 3820,2720 3810,2710 3810,2570 3820,2560 3970,2560 3980,2570 3980,2710 3970,2720
Motor_C on Bottom Layer "MOTOR_C_L02_P087" (solid, remove dead copper, pour order 87): 4140,2720 4130,2710 4130,2570 4140,2560 4290,2560 4300,2570 4300,2710 4290,2720
Motor_A on Bottom Layer "MOTOR_A_L02_P083" (solid, remove dead copper, pour order 83): 3495,2720 3475,2700 3475,2580 3495,2560 3645,2560 3665,2580 3665,2700 3645,2720
+24V on Bottom Layer "+24V_L02_P081" (solid, remove dead copper, pour order 81): 4140,3045 4130,3035 4130,2895 4290,2895 4290,3045
+24V on Bottom Layer "+24V_L02_P077" (solid, remove dead copper, pour order 77): 3495,3050 3485,3040 3485,2900 3655,2900 3655,3040 3645,3050
SP_C on Bottom Layer "SP_C_L02_P049" (solid, remove dead copper, pour order 49): 4125,2400 4040,2485 4040,3160 4125,3245 4235,3245 4240,3240 4240,3175 4230,3165 4135,3165 4120,3150 4120,2535 4125,2530 4260,2530 4270,2520 4270,2405 4265,2400
SP_B on Bottom Layer "SP_B_L02_P045" (solid, remove dead copper, pour order 45): 3810,2400 3940,2400 3945,2405 3945,2520 3935.83,2529.17 3801.25,2529.17 3801.25,2408.75

## Keep-outs
Keep-Out Layer:
  the board outline again, w10

## Other copper
Top Layer:
  rectangle net Motor_A: 3460,2565 3615,2855
  pour cut-out: 3801.77,3506.77 3800.61,3505.61 3800.61,3471.46 3788.54,3471.46 3755,3505 3735,3485 3780,3485 3795,3470 3796.46,3471.46 3800.61,3471.46
  pour cut-out: 4152.01,3437.99 4292.01,3437.99 4345.71,3384.29 4345.71,3325 4265,3325
  pour cut-out: 3790,3475 3800,3465 3800,3422.79 3737.79,3422.79
  pour cut-out: 3685,3505 3640,3460 3640,3425 3675,3425 3755,3505
  region net Motor_C: 4340,2635
  region net Motor_C: 4325,2705 4325,2650 4430,2545 4430,2600
  region net Motor_C: 4300,2555 4375,2555 4375,2640 4300,2685
  region: 4395,2635
  region net Motor_C: 4395,2615
  region net Motor_C: 4300,2715 4300,2655 4325,2655 4350,2680 4315,2715
  region net Motor_B: 4010,2705 4070,2645 4070,2390 4010,2330
  region net Motor_C: 4360,2615 4394.68,2580.32 4430,2580.32 4430,2340 4350,2260 4350,2625 4380.32,2625 4425,2580.32 4395,2550.32 4395,2545
  region net Motor_C: 4310,2555 4369.29,2495.71 4381.14,2566.86
  region net Motor_B: 3955,2555 4005,2505 4015,2565
  region net Motor_A: 3635,2560 3685,2510 3695,2570
  region net Motor_A: 3625,2560
  region net Motor_A: 3650,2560 3690,2560 3690,2685 3665,2700 3650,2695
  region net Motor_B: 3980,2685 4010,2680 4010,2555 3975,2555 3975,2695
  region net Motor_A: 3655,2700
  region net Motor_A: 3655,2690
  region net Motor_A: 3655,2690
  region net SP_C: 4120,2530 4270,2530 4270,2400 4120,2400
  region net SP_B: 3800,2525 3945,2525 3945,2400 3800,2400
  region net SP_A: 3475,2525 3625,2525 3625,2420 3375,2420 3375,2500 3475,2500
  region net +24V: 4115,3070 4310,3070 4310,2885 4115,2885
  region net +24V: 3795,3070 3990,3070 3990,2885 3795,2885
  region net +24V: 3470,3070 3660,3070 3660,2890 3470,2890
  region net Motor_C: 4110,2850 4265,2850 4265,2785 4310,2750 4310,2555 4115,2555 4110,2560
  region net Motor_B: 3790,2850 3940,2850 3940,2785 3985,2750 3985,2555 3790,2555
  region net Motor_A: 3460,2855 3615,2855 3615,2790 3660,2755 3660,2560 3465,2560 3460,2565
  region net Motor_A: 3460,2845
  region: 3420,2790
  region: 3420,2745
  text "2362.205 (mil)" at 2775.99,2873.02 h60 r90
  text "3149.611 (mil)" at 4368.18,1849.01 h60

## Silkscreen, mask and mechanical layers (free items; w line width, h text height)
Top Overlay:
  text "+" at 3635,4325 h60
  text "-" at 4140,4325 h60
  text "GND" at 5180,2560 h30
  text "5V" at 5280,2560 h30
  text "SDA" at 5350,2560 h30
  text "SCL" at 5450,2560 h30
  text "DIR" at 5545,2560 h30
  text "A" at 3675,2440 h60
  text "C" at 4365,2440 h60
  text "B" at 4000,2435 h60